# Altium PCB DACN_pcb.PcbDoc
Units mm, origin at the board's own origin, x right, y up, seen from the top; angles counter-clockwise.
Board outline 79.39 x 60.25 mm, 2 copper layers (Top Layer, Bottom Layer); 54 components, 47 nets, 221 pads, 8 vias.
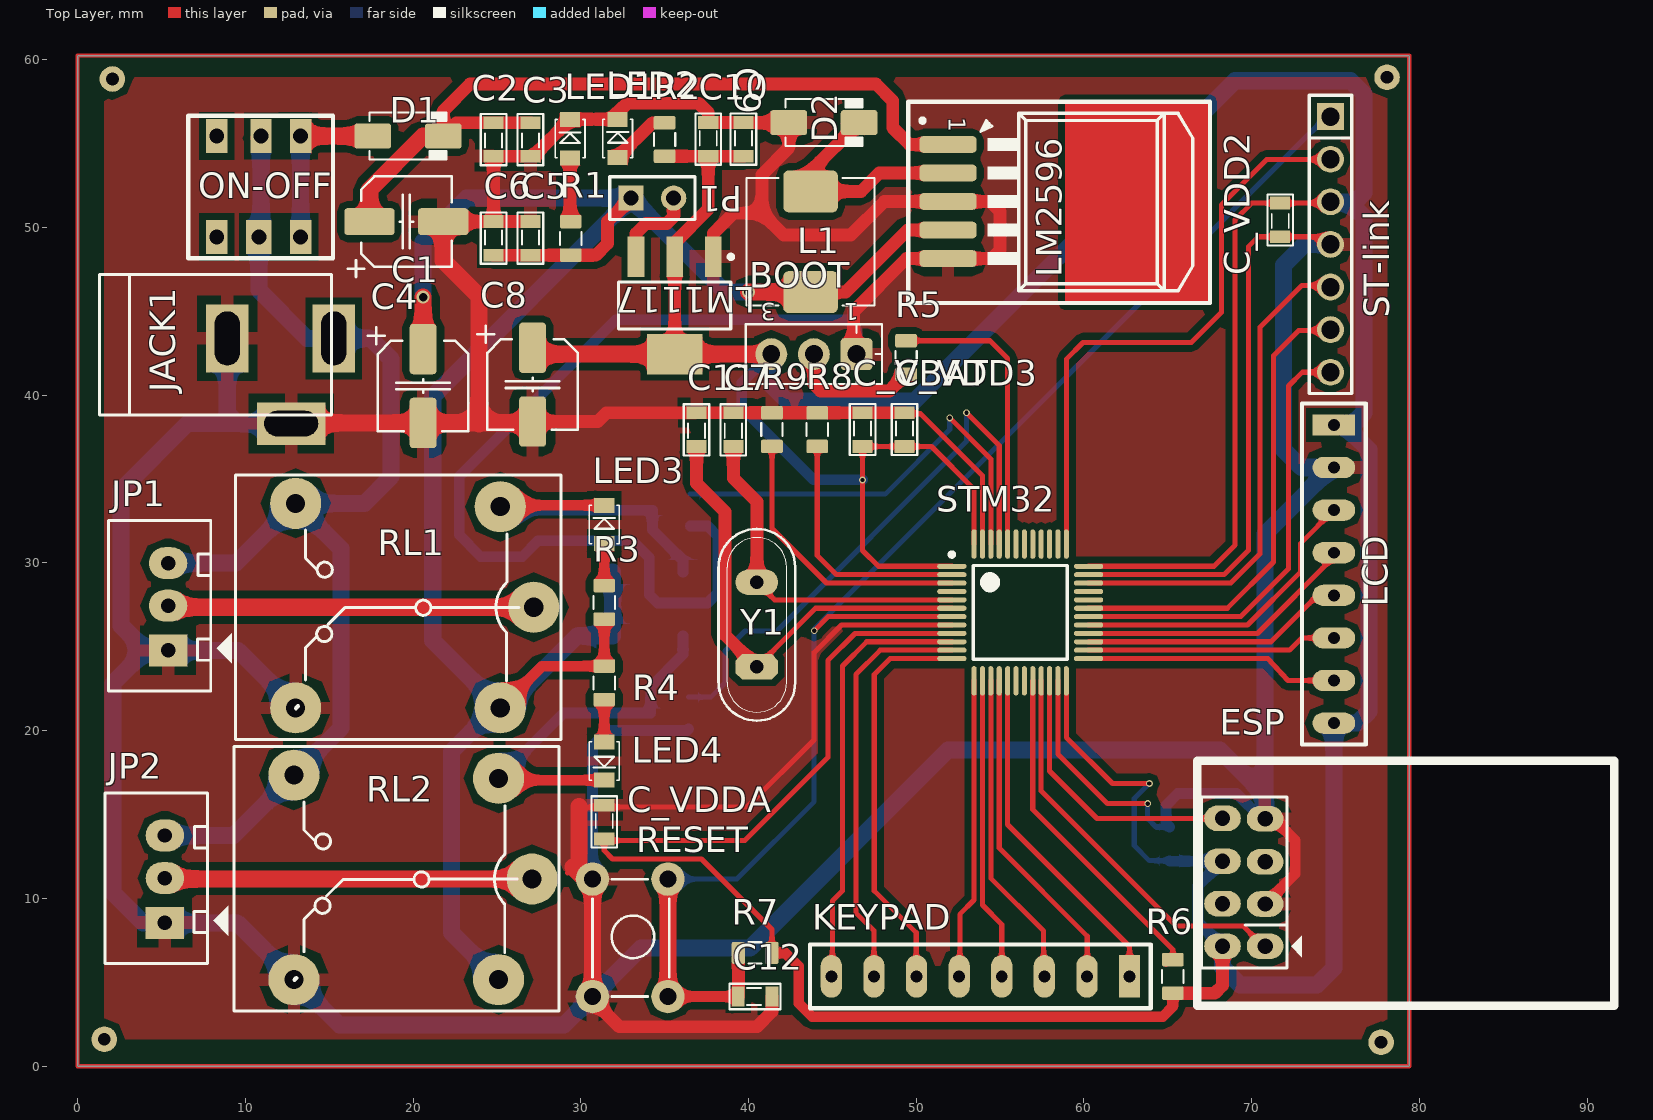
[diagram p0: Top Layer view]
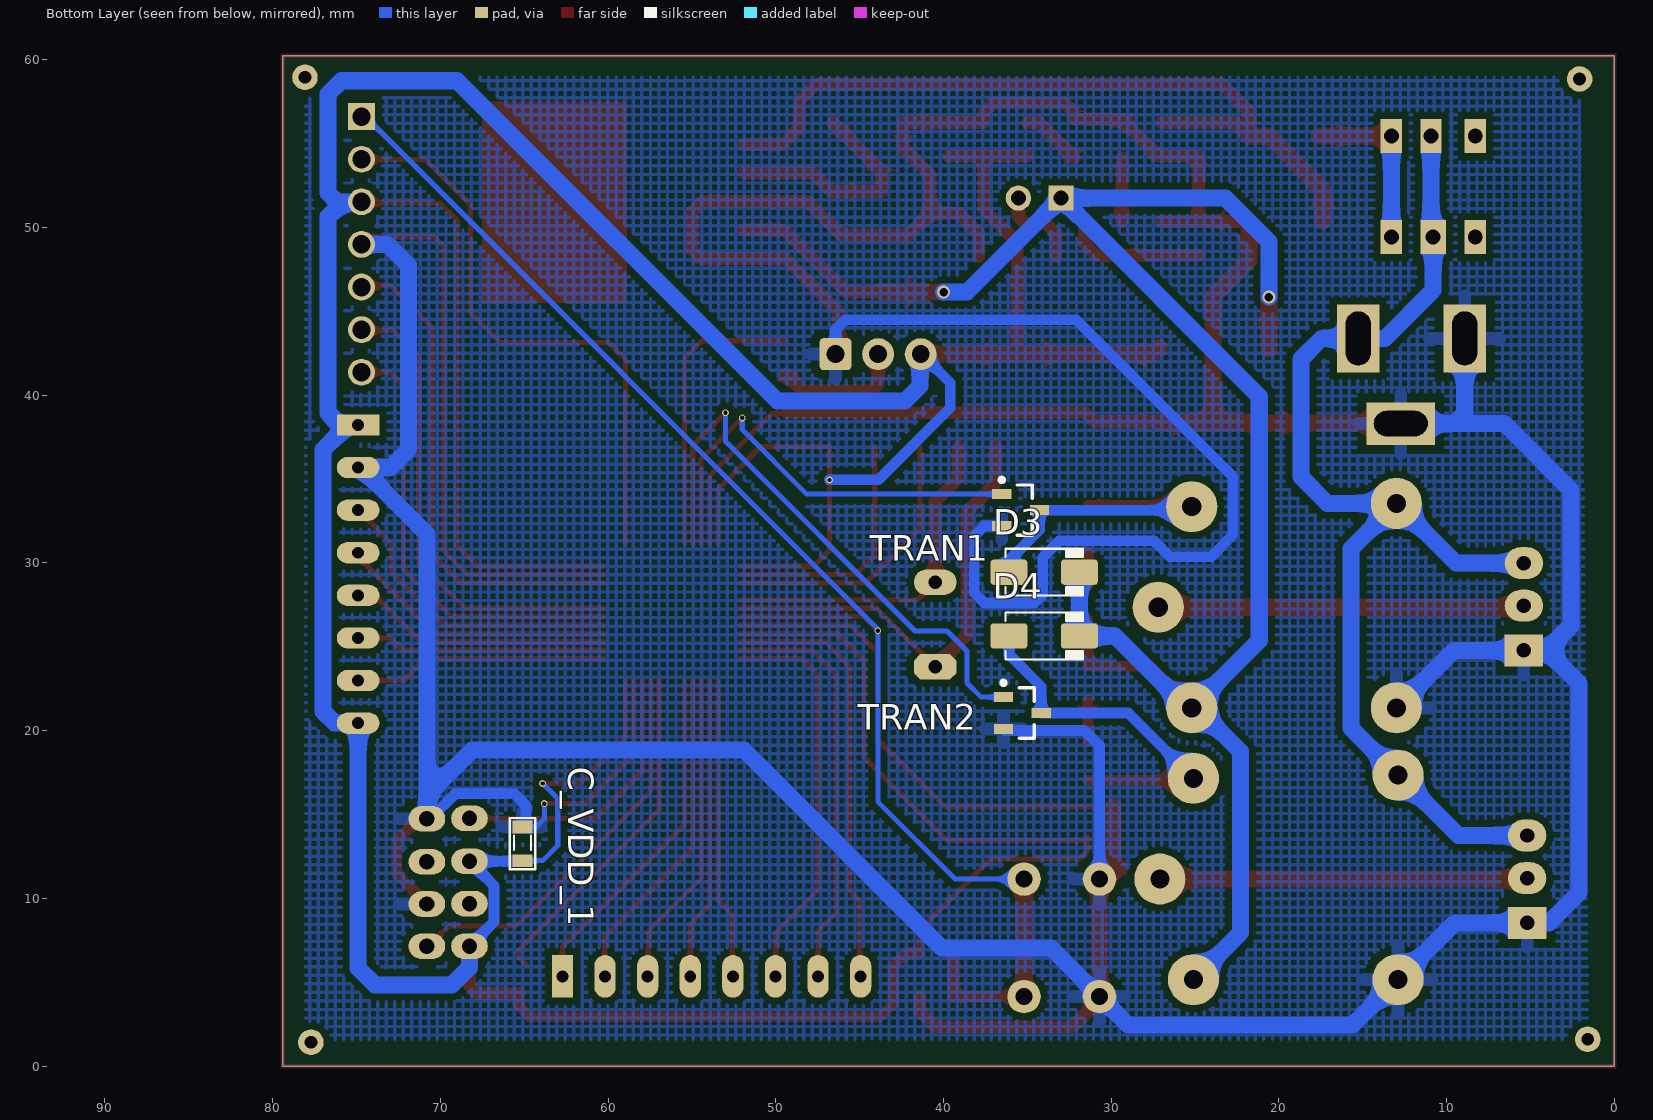
[diagram p1: Bottom Layer view, seen from below]
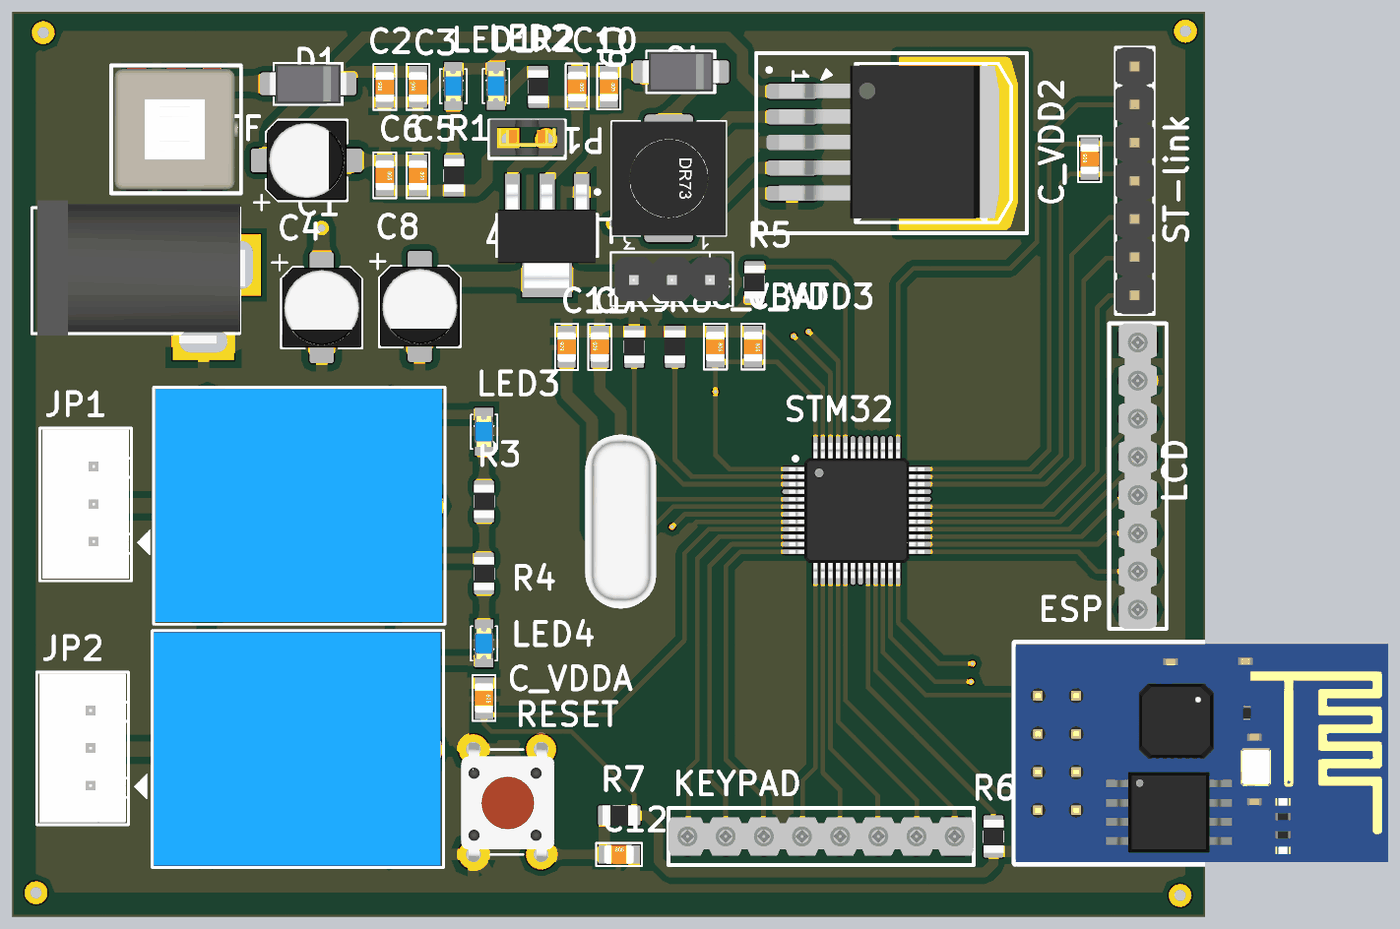
[diagram p2: 3D render of the assembled board from above, using the file's embedded part models]
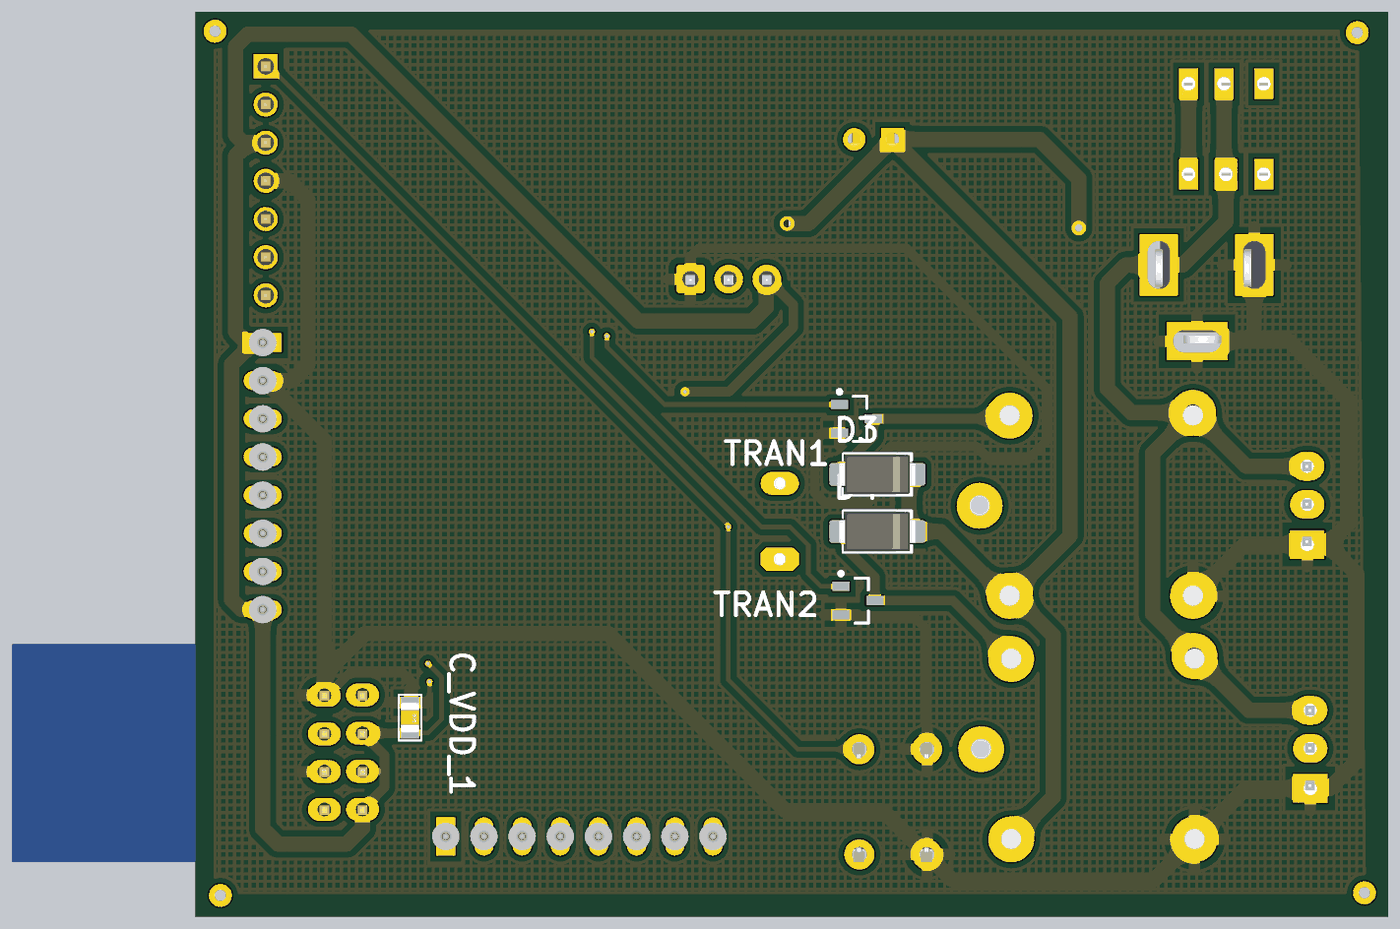
[diagram p3: 3D render of the assembled board from below, using the file's embedded part models]

## Layer stack, top to bottom
Top Solder: solder mask 0.0102, Solder Resist, Dk 3.5
Top Layer: signal copper 0.0356
Dielectric 1: dielectric 0.32, FR-4, Dk 4.8
Bottom Layer: signal copper 0.0356
Bottom Solder: solder mask 0.0102, Solder Resist, Dk 3.5

## Board outline
0,0 79.392,0 79.392,33.958 79.392,60.25 0,60.25

## Design rules (kind name [scope] priority, off if disabled: settings)
Clearance [All] p1: gap=0.4 ignorepadtopadclearanceinfootprint=FALSE
PlaneConnect [All] p1: planeconnectstyle=Relief reliefexpansion=0.508 reliefentries=4 reliefconductorwidth=1 reliefairgap=0.4
PolygonConnect [All] p1: connectstyle=Relief reliefconductorwidth=0.762 reliefentries=4 polygonreliefangle="90 Angle" airgapwidth=0.508
RoutingVias [All] p1: holewidth=1.2 width=1.5 viastyle="Through Hole" minholewidth=1.2 minwidth=1.5 maxholewidth=1.2 maxwidth=1.5
SolderMaskExpansion [All] p1: expansion=0.102
Width [All] p1: maxlimit=1.016 minlimit=0.305 preferedwidth=0.635
29 further rules are at their usual default settings.

## Components (designator, comment, footprint, x,y, rotation, side; value= is the part's Value field where it differs from the comment)
BOOT "CONN_HEADER_1x3P_0.100in" 1x3POS_HEADER 43.9,42.45 r270 top value="Single-row, 3 positions"
C1 "10µF" CAP_ELEC_5x5.7 19.6,50.35 r180 top
C2 "105" SM-CAP-0805 24.8,54.091 r90 top value=0,1uF/300V
C3 "104" SM-CAP-0805 27,54.091 r90 top value=0,1uF/300V
C4 "10µF" CAP_ELEC_5x5.7 20.6,40.55 r90 top
C5 "105" SM-CAP-0805 27,50.503 r270 top value=0,1uF/300V
C6 "104" SM-CAP-0805 24.8,50.503 r270 top value=0,1uF/300V
C7 "20pF" SM-CAP-0805 39.1,36.791 r90 top value=0,1uF/300V
C8 "10µF" CAP_ELEC_5x5.7 27.127,40.63 r90 top
C9 "105" SM-CAP-0805 39.7,56.409 r270 top value=0,1uF/300V
C10 "104" SM-CAP-0805 37.6,56.409 r270 top value=0,1uF/300V
C11 "20pF" SM-CAP-0805 36.9,36.791 r90 top value=0,1uF/300V
C12 "100nF" SM-CAP-0805 39.241,4.15 r0 top value=0,1uF/300V
C_VBAT "104" SM-CAP-0805 46.8,39.103 r270 top value=0,1uF/300V
C_VDD2 "104" SM-CAP-0805 71.7,49.298 r90 top value=0,1uF/300V
C_VDD3 "104" SM-CAP-0805 49.3,39.103 r270 top value=0,1uF/300V
C_VDD_1 "104" SM-CAP-0805 65.1,14.409 r270 bottom value=0,1uF/300V
C_VDDA "104" SM-CAP-0805 31.4,15.709 r270 top value=0,1uF/300V
D1 "Diode  1N4007" DO-214AC 19.7,55.45 r0 top value=1N4007
D2 "Diode  1N4007" DO-214AC 44.5,56.25 r0 top value=1N4007
D3 "Diode  1N4007" DO-214AC 34,29.45 r180 bottom value=1N4007
D4 "Diode  1N4007" DO-214AC 34,25.65 r180 bottom value=1N4007
ESP "ESP8266" ESP2866 70.8,7.15 r90 top
JACK1 "JACK DC" "JACK DC" 12.1,40.85 r0 top value="Jac DC"
JP1 "JP3" CON3 5.4,24.91 r90 top value="Connector 3"
JP2 "JP3" CON3 5.2,8.67 r90 top value="Connector 3"
KEYPAD "JP8" jam8 62.72,5.35 r180 top value="Connector 8"
L1 "33µH" IND_WW_DR73 43.7,49.15 r270 top
LCD "JP8" jam8 74.9,38.23 r270 top value="Connector 8"
LED1 "LED SMD" SM-LED-0805-Blue 29.36,54.15 r90 top
LED2 "LED SMD" SM-LED-0805-Blue 32.2,54.164 r90 top
LED3 "LED SMD" SM-LED-0805-Blue 31.4,31.15 r90 top
LED4 "LED SMD" SM-LED-0805-Blue 31.4,19.336 r270 top
LM1117 "LM1117-adj" SOT223-4N 35.6,45.35 r270 top value=LM317
LM2596 "LM2976" TO263 57.869,51.931 r270 top
ON-OFF "SW 6 PIN" SW6 8.271,50.015 r90 top
P1 "HEADER" "JUMPER PITCH 2 PIN" 33,51.75 r0 top
R1 "Jumper" RESC2012N_ZERO 29.4,49.35 r90 top value=1K
R2 "Jumper" RESC2012N_ZERO 35,55.25 r90 top value=1K
R3 "Jumper" RESC2012N_ZERO 31.4,27.65 r90 top value=1K
R4 "Jumper" RESC2012N_ZERO 31.4,22.85 r270 top value=1K
R5 "Jumper" RESC2012N_ZERO 49.4,42.25 r90 top value=1K
R6 "Jumper" RESC2012N_ZERO 65.3,5.35 r90 top value=1K
R7 "Jumper" RESC2012N_ZERO 40.4,6.75 r0 top value=100K
R8 "Jumper" RESC2012N_ZERO 44.1,37.95 r90 top value=10K
R9 "Jumper" RESC2012N_ZERO 41.4,37.95 r90 top value=10K
RESET "SWITCH" "SW 4PIN" 30.7,4.15 r90 top
RL1 "Relay" RL_SPDT_10A 27.2,27.358 r180 top value="Relay SPDT, 10A, 12V"
RL2 "Relay" RL_SPDT_10A 27.1,11.158 r180 top value="Relay SPDT, 10A, 12V"
ST-link "JP7" JP7-D1T 74.7,56.61 r270 top
STM32 "STM32F103C8T6-LQFP48" "LQFP 48 PIN" 56.2,27.05 r0 top
TRAN1 "C1815" C1815 35.4,33.15 r180 bottom
TRAN2 "C1815" C1815 35.3,21.05 r180 bottom
Y1 "8 MHz" "CRYSTAL DIP" 40.5,26.31 r90 top

## Footprints (in the part's own frame and the unit in brackets; to place one, negate y for a bottom-side part, rotate by r counter-clockwise, add the part's x,y. Pads: shape width x height; smd on the part's side, far side on the other; paste and mask are expansions set on the pad)
1x3POS_HEADER [mil] "Connector Header, Single-row 3-position, 0.100\" pitch"
  rrect25% 75x75 hole 42: 1(0,100)
  round 75 hole 42: 2(0,0) 3(0,-100)
  silkscreen extent -70,-160 70,160, body extent -57,-150 57,150, height 335
C1815 [mm] "SOT23, 3-Leads, Body 2.9x1.3mm, Pitch 0.95mm, Lead Span 2.4mm, IPC Medium Density"
  rect 1.15x0.6 smd: 1(-1.125,0.95) 2(-1.125,-0.95) 3(1.125,0)
  silkscreen extent -1.25,-1.5 0.7,1.92, body extent -0.7,-1.5 0.7,1.5, height 1.14
CAP_ELEC_5x5.7 [mm] "Capacitor, polarized, aluminum can; 5x5.7mm DxH"
  round 0.508 on Mech15: 0(0,0)
  rrect25% 3x1.6 smd: 1(2.2,0) 2(-2.2,0)
  silkscreen extent -2.7,-2.7 3.5,3.3, body extent -2.65,-2.65 2.65,2.65, height 5.7
CON3 [mil] "CON 3 - Header White"
  rect 75x90 hole 34: 1(-5,0)
  oval 75x90 hole 34: 2(100,0) 3(200,0)
  silkscreen extent -100,-150 300,140, body extent -94,-94 296,133, height 276
"CRYSTAL DIP" [mm]
  oct 1.524x2.54 hole 0.8: 1(-2.5,0)
  oval 1.524x2.54 hole 0.8: 2(2.54,0)
  silkscreen extent -5.71,-2.29 5.71,2.29, body extent -5.63,-2.35 5.72,2.3, height 3.5
DO-214AC [mm] "JEDEC DO214 variation AC. SMA"
  round 0.508 on Mech15: 0(0,0)
  rrect25% 2.2x1.5 smd: A(-2.1,0) K(2.1,0)
  silkscreen extent -2.3,-1.4 2.3,1.4, body extent -2.6,-1.3 2.6,1.3, height 2.42
ESP2866 [mil]
  oval 60x86 hole 36: 1(0,0) 2(99,0) 3(198,0) 4(299,0) 5(0,100) 6(100,100) 7(199.5,100) 8(300,100)
  silkscreen extent -140,-820 435,159, body extent -137,-817 433,159, height 231
IND_WW_DR73 [mm] "Wire-wound power inductor, Cooper Bussmann DR73 series, IPC Medium Density"
  round 0.5 on Mech15: 0(0,0)
  rrect25% 2.5x3.25 smd: 1(-3,0) 2(3,0)
  silkscreen extent -3.81,-3.81 3.81,3.81, body extent -3.8,-3.8 3.8,3.8, height 3.55
"JACK DC" [mm] "Jac DC input"
  rect 2.54x4.064 hole 1.5 slot 3.2 at 90 deg: 1(3.175,2.54) 2(-3.175,2.54)
  rect 4.064x2.54 hole 1.5 slot 3.2 at 0 deg: 3(0.635,-2.54)
  silkscreen extent -10.8,-2.03 3.05,6.35, body extent -10.42,-2.67 3.4,6.84, height 11.02
jam8 [mil]
  rect 50x100 hole 28: 1(0,0)
  oval 50x100 hole 28: 2(100,0) 3(200,0) 4(300,0) 5(400,0) 6(500,0) 7(600,0) 8(700,0)
  silkscreen extent -50,-75 750,75, body extent -50,-50 750,50, height 704
JP7-D1T [mm] "7 pins, 1 row, straight, gold plating"
  rect 1.6x1.6 hole 1.1: 1(0,0)
  round 1.6 hole 1.1: 2(2.54,0) 3(5.08,0) 4(7.62,0) 5(10.16,0) 6(12.7,0) 7(15.24,0)
  silkscreen extent -1.27,-1.27 16.51,1.27, body extent -1.27,-1.27 16.51,1.27, height 8.54
"JUMPER PITCH 2 PIN" [mm] "Connector; Header; 2 Position"
  rect 1.5x1.5 hole 0.9: 1(0,0)
  round 1.5 hole 0.9: 2(2.54,0)
  silkscreen extent -1.27,-1.27 3.81,1.27, body extent -1.27,-1.27 3.81,1.33, height 7.6
"LQFP 48 PIN" [mm] "TSQFP, 48-Leads, Body 9.2x9.2mm (max), Pitch 0.50mm, IPC Medium Density"
  oval 1.75x0.3 smd: 1(-4.075,2.75) 2(-4.075,2.25) 3(-4.075,1.75) 4(-4.075,1.25) 5(-4.075,0.75) 6(-4.075,0.25) 7(-4.075,-0.25) 8(-4.075,-0.75) 9(-4.075,-1.25) 10(-4.075,-1.75) 11(-4.075,-2.25) 12(-4.075,-2.75) 25(4.075,-2.75) 26(4.075,-2.25) 27(4.075,-1.75) 28(4.075,-1.25) 29(4.075,-0.75) 30(4.075,-0.25) 31(4.075,0.25) 32(4.075,0.75) 33(4.075,1.25) 34(4.075,1.75) 35(4.075,2.25) 36(4.075,2.75)
  oval 0.3x1.75 smd: 13(-2.75,-4.075) 14(-2.25,-4.075) 15(-1.75,-4.075) 16(-1.25,-4.075) 17(-0.75,-4.075) 18(-0.25,-4.075) 19(0.25,-4.075) 20(0.75,-4.075) 21(1.25,-4.075) 22(1.75,-4.075) 23(2.25,-4.075) 24(2.75,-4.075) 37(2.75,4.075) 38(2.25,4.075) 39(1.75,4.075) 40(1.25,4.075) 41(0.75,4.075) 42(0.25,4.075) 43(-0.25,4.075) 44(-0.75,4.075) 45(-1.25,4.075) 46(-1.75,4.075) 47(-2.25,4.075) 48(-2.75,4.075)
  silkscreen extent -4.2,-2.8 2.8,3.57, body extent -4.5,-4.5 4.5,4.5, height 1.45
RESC2012N_ZERO [mm] "Chip Resistor, Body 2.0x1.2mm, 0805, IPC Medium Density"
  round 0.254 on Mech15: 0(0,0)
  rrect25% 0.8x1.3 smd: 1(-1,0) 2(1,0)
  Top Layer pour cut-out: -0.725,0.65 -0.525,0.85 0.525,0.85 0.725,0.65 0.725,-0.65 0.525,-0.85 -0.525,-0.85 -0.725,-0.65
  silkscreen extent -0.38,-0.64 0.38,0.64, body extent -1.1,-0.67 1.1,0.68, height 0.69
RL_SPDT_10A [mil] "Relay SPDT, 5 pin, 10A,W 650mil, L 800mil, H 800mil"
  round 120 hole 45: 1(0,0) 2(559.06,236.22) 3(559.06,-243.78) 4(78.74,-236.22) 5(78.74,236.22)
  silkscreen extent -63,-311 700,310, body extent -55,-306 697,304, height 602
SM-CAP-0805 [mil]
  rect 30x47.24 smd: 1(6,0) 2(85,0)
  silkscreen extent -15,-30 105,30, body extent 6,-25 84,25, height 31
SM-LED-0805-Blue [mm]
  rect 0.9x1.2 smd: 1(0,0) 2(2.286,0)
  silkscreen extent 0,-0.89 2.29,0.89, body extent 0.13,-0.62 2.15,0.63, height 1.1
SOT223-4N [mm] "SOT223, 4-Leads, Body 6.5x3.5mm, Pitch 2.3mm, Lead Span 7mm, IPC Medium Density"
  rect 2.4x1 smd: 1(-2.9,2.3) 2(-2.9,0) 3(-2.9,-2.3)
  rect 2.4x3.3 smd: 4(2.9,0)
  silkscreen extent -3.02,-3.35 1.4,3.48, body extent -3.39,-3.27 3.5,3.23, height 1.72
SW6 [mil]
  rect 80x50 hole 35: 1(-23,-1) 3(-23,-198) 4(214,-198) 5(214,-105) 6(214,-1)
  rect 80x60 hole 35: 2(-23,-100)
  silkscreen extent -73,-274 262,66, body extent -62,-265 252,57, height 524
"SW 4PIN" [mm] "SW button 4pin, 250 x250 mil"
  round 2 hole 1: 1(0,0) 1(7,0) 2(0,-4.5) 2(7,-4.5)
  silkscreen extent 0,-4.57 6.98,0, body extent -0.52,-5.39 7.38,0.81, height 7
TO263 [mm]
  rrect50% 1x3.4 smd: 1(-3.019,-5.969) 2(-1.319,-5.969) 4(2.081,-5.969) 5(3.781,-5.969)
  rrect50% 1x3.4 smd mask+0: 3(0.381,-5.969)
  Top Layer region: -5.568,1.016 6.432,1.016 6.432,9.65 -5.568,9.65
  silkscreen extent -5.57,-8.35 6.43,9.65, body extent -4.73,-6.84 5.43,7.8, height 4.57

## Part data
BOOT: "Pin Header, THT, Single-row, 2.54mm pitch", Manufacturer 1=3M, Manufacturer Part Number 1=929647-09-36-I, Package / Case="Pin header; 2.54mm pitch", Category=Connectors, Mounting Type="Through Hole", Pitch="0.100\" (2.54mm)", QtyOverride=0.1, SCDType=undef, Terminal Block Type="Header, Male Pins, Single"
C1 C4 C8: library part "CAP Aluminum"
  C1: =680µF
  C4: =220µF
  C8: =100µF
C2 C3 C5 C6 C7 C9 C10 C11 C12 C_VBAT C_VDD2 C_VDD3 C_VDD_1 C_VDDA: library part "CAP SMD", Designed by=VanDungEvn
D1 D2 D3 D4: "Diode 1A"
JP1 JP2: library part Con3, "Connector 3"
KEYPAD LCD: library part "jam 8", "jam 8"
L1: library part INDC_10u_DR73-100-R, "Inductor Power 10µH 2.1A 7.6x7.6mm SMD", Manufacturer 1="Cooper Bussmann", Manufacturer Part Number 1=DR73-100-R, Package / Case=5.0x5.0x4.5mm, Ratings="2.1 A", Supplier Part Number 1=513-1129-1-ND, Tolerance=±20%, ComponentLink1Description=http://www.cooperindustries.com/content/dam/public/bussmann/Electronics/Resources/Data%20Sheets/Bus_Elx_DS_4315_DR_Series.pdf, ComponentLink1URL=http://www.cooperindustries.com/content/dam/public/bussmann/Electronics/Resources/Data%20Sheets/Bus_Elx_DS_4315_DR_Series.pdf, Material="ferrite shielded", SCDType=spec, Supplier 1=Digi-Key
LED1 LED2 LED3 LED4: library part "LED SMD 0805"
LM1117: "3v3"
LM2596: library part LM2596, Max Input Voltage="12 V", Max Output Current="3 (6.0 peak) A", Max Output Voltage=mV, Temperature Range="-40 to +125 degC", Category=IC-Power, Min Input Voltage=mV, Min Output Voltage=mV, Mounting Technology="Surface Mount", Status=Unreleased, Supply Voltage=mV
P1: library part "HEADER CONNECT"
R1 R2 R3 R4 R5 R6 R7 R8 R9: library part RES_0805, "Resistor SMD chip 0.0 Ohm 0.125W 0805", Manufacturer 1="Samsung Electro-Mechanics America, Inc", Manufacturer 2="Stackpole Electronics Inc", Manufacturer 3=Yageo, Manufacturer 4="Panasonic Electronic Components", Manufacturer 5="Rohm Semiconductor", Manufacturer Part Number 1=RC2012J000CS, Manufacturer Part Number 2=RMCF0805ZT0R00, Manufacturer Part Number 3=RC0805JR-070RL, Manufacturer Part Number 4=ERJ-6GEY0R00V, Manufacturer Part Number 5=MCR10ERTJ000, Package / Case="0805 (2012 metric)", Ratings=1/8W, Supplier Part Number 1=1276-5466-6-ND, Tolerance=N/A, ComponentLink1Description=http://www.samsungsem.com/servlet/FileDownload?filename=productcatalog/pdf/Chip_Resistor.pdf, ComponentLink1URL=http://www.samsungsem.com/servlet/FileDownload?filename=productcatalog/pdf/Chip_Resistor.pdf, ComponentLink2Description=http://www.seielect.com/Catalog/SEI-RMCF_RMCP.pdf, ComponentLink2URL=http://www.seielect.com/Catalog/SEI-RMCF_RMCP.pdf, ComponentLink3Description=http://media.digikey.com/pdf/Data%20Sheets/Yageo%20PDFs/RC0805%20Pb%20Free.pdf, ComponentLink3URL=http://media.digikey.com/pdf/Data%20Sheets/Yageo%20PDFs/RC0805%20Pb%20Free.pdf, ComponentLink4Description=http://industrial.panasonic.com/www-cgi/jvcr13pz.cgi?E+PZ+3+AOA0001+ERJ6GEY0R00V+7+WW, ComponentLink4URL=http://industrial.panasonic.com/www-cgi/jvcr13pz.cgi?E+PZ+3+AOA0001+ERJ6GEY0R00V+7+WW, ComponentLink5Description=http://rohmfs.rohm.com/en/products/databook/datasheet/passive/resistor/chip_resistor/mcr_g.pdf, ComponentLink5URL=http://rohmfs.rohm.com/en/products/databook/datasheet/passive/resistor/chip_resistor/mcr_g.pdf, RoHS 1="RoHS Compliant", RoHS 2="RoHS Compliant", RoHS 3="RoHS Compliant", RoHS 4="RoHS Compliant", RoHS 5="RoHS Compliant", SCDType=spec, Supplier 1=Digi-Key, Supplier 2=Digi-Key, Supplier 3=Digi-Key, Supplier 4=Digi-Key, Supplier 5=Digi-Key, Supplier Part Number 2=RMCF0805ZT0R00DKR-ND, Supplier Part Number 3=311-0.0ARDKR-ND, Supplier Part Number 4=P0.0ADKR-ND, Supplier Part Number 5=RHM0.0CPDKR-ND
RL1 RL2: library part "Relay SRD", "Relay SPDT 5 Pin", ="Relay SPDT, 10A, 24V"
ST-link: "WR-PHD 2.54 mm Angled Socket Header", Manufacturer="W¨¹rth Elektronik eiSos GmbH", partNo=613007143121, ComponentLink1 Description=Manufacturer, ComponentLink1URL=http://www.we-online.com, ComponentLink2 Description=Datasheet, ComponentLink2URL=http://katalog.we-online.de/em/datasheet/6130xx143121.pdf, Created by="Karrer Zheng", Created Date="29 March 2013", NoPins=07
TRAN1 TRAN2: "NPN 600mW, ECB", =C2383
Y1: library part Crystal, LatestRevisionDate=17-Jul-2002, LatestRevisionNote="Re-released for DXP Platform.", PackageReference=R38, Published=8-Jun-2000, Publisher="Altium Limited"
RESET: LatestRevisionDate=17-Jul-2002, LatestRevisionNote="Re-released for DXP Platform.", PackageReference=SPST-2, Published=24-Mar-1999, Publisher="Altium Limited"
STM32: ComponentLink1Description="Manufacturer Link", ComponentLink1URL=www.st.com/stm32, ComponentLink2Description=Datasheet, ComponentLink2URL=http://www.st.com/stonline/products/literature/ds/13586.pdf, DatasheetVersion="rev6, Mar-2008", PackageDescription="48-Pin Low-Profile Quad Flat Pack, 7 x 7 mm Body, 0.5 mm Pitch (LQFP48)", PackageReference=LQFP48, PackageVersion=Mar-2008, Published=30-May-2008, Publisher="Altium Limited"

## Free pads (board coordinates)
  round 1.524 hole 0.762: 2(78.071,58.953) 5(77.716,1.422) 6(1.592,1.6) 7(2.075,58.852)

## Via types
v1: diameter 0.406, hole 0.254, Top Layer to Bottom Layer, 6 vias
v2: diameter 0.762, hole 0.508, Top Layer to Bottom Layer, 2 vias

## Nets (pads, with @x,y where several pads share a name; then routed paths per layer and width w, separated by ;. In a path a pad name is that pad's centre, name@x,y a point inside that pad or via, vN(x,y) a via of type N, cw(c..) or ccw(c..) an arc to the next point about the centre after c; other vN are vias at no path point)
+3.3V: BOOT.3 C8.1 C9.2 C10.2 C_VBAT.2 C_VDD2.2 C_VDD3.2 C_VDD_1.2 C_VDDA.2 ESP.5 ESP.7 LCD.1 LCD.8 LM1117.2 LM1117.4 R2.1 R6.1 R7.2 ST-link.3 STM32.1 STM32.9 STM32.24 STM32.36 STM32.48 | length 316.4
  Top Layer w0.305: C_VDDA.2 31.4,12.85 31.9,12.35 37.2,12.35 41.4,8.15 R7.2 ; C_VDDA.2@31.4,13.65 31.6,13.45 39.775,13.45 44.733,18.408 44.733,24.183 46.35,25.8 STM32.9 ; STM32.1 47.75,29.8 46.8,30.75 v1(46.8,34.95) C_VBAT.2 C_VDD3.2 50.907,36.944 53.45,34.4 STM32.48 ; STM32.24 58.95,19.6 61.7,16.85 v1(63.9,16.85) ; STM32.36 67.75,29.8 69.01,31.06 69.01,50.46 70,51.45 C_VDD2.2@71.7,51.45 ; C_VDD2.2 74.627,51.457 ST-link.3
  Top Layer w0.635: R7.2 42.2,6.75 43,5.95 43,3.75 43.8,2.95 64.7,2.95 65.3,3.55 R6.1
  Top Layer w0.762: R2.1 C10.2 ; LM1117.4 LM1117.2 ; LM1117.2@35.6,48.05 35.6,49.096 37.6,51.096 C10.2 ; C9.2 C10.2 ; R6.1 67.8,4.35 68.26,4.81 ESP.5
  Top Layer w1.016: C8.1 27.507,42.45 LM1117.4 BOOT.3@41.16,42.45
  Top Layer w1.143: BOOT.3@41.16,42.45 BOOT.3@41.36,42.65
  Bottom Layer w0.305: v1(63.9,16.85) 63,15.95 63,13.15 63.9,12.25 C_VDD_1.2
  Bottom Layer w0.635: BOOT.3@41.1,42.25 39.6,40.75 39.6,39.25 43.9,34.95 v1(46.8,34.95) ; C_VDD_1.2 65.133,12.217 ESP.7 66.8,10.757 66.8,8.61 ESP.5
  Bottom Layer w1.016: BOOT.3@41.4,42.05 41.4,40.55 42.3,39.65 49.9,39.65 69,58.75 75.9,58.75 76.7,57.95 76.7,52.05 76.18,51.53 75.82,51.53 ; ESP.5 68.26,5.89 69.3,4.85 73.9,4.85 74.9,5.85 LCD.8 76.3,20.45 76.983,21.133 76.983,36.767 LCD.1@75.52,38.23 ; ST-link.3 75.82,51.53 ; LCD.1 LCD.1@75.52,38.23 ; LCD.1@75.52,38.23 75.98,38.23 76.7,38.95 76.7,50.65 75.82,51.53
+5V: C4.1 C5.2 C6.2 D3.K D4.K L1.2 LM2596.4 P1.1 R1.1 R3.1 R4.1 RL1.5 RL2.5 | length 131
  Top Layer w0.635: RL1.5 27.692,23.85 R4.1 R3.1
  Top Layer w0.762: C6.2 C5.2 29.393,48.344 R1.1 30.9,48.35 31.6,49.05 31.6,50.35 P1.1 ; L1.2 45.8,46.15 49.5,49.85 LM2596.4
  Top Layer w1.016: C4.1 v2(20.6,45.85) ; v2(40,46.15) L1.2
  Bottom Layer w1.016: v2(20.6,45.85) 20.6,49.15 23.2,51.75 P1.1 ; RL2.5 22.3,7.958 22.3,18.75 24.908,21.358 RL1.5 ; D3.K D4.K 29.782,25.65 25.49,21.358 RL1.5 ; v2(40,46.15) 38.6,46.15 P1.1 ; RL1.5 21.175,25.383 21.175,39.926 P1.1
+12V: JACK1.1 JP1.3 JP2.3 ON-OFF.2 ON-OFF.5 RL1.3 RL2.3 | length 69.5
  Top Layer w1.016: ON-OFF.5@10.811,55.323 ON-OFF.5 ON-OFF.5@10.938,55.87
  Bottom Layer w1.016: JP2.3 9.3,13.75 RL2.3 15.7,20.15 15.7,30.85 RL1.3 ; JP1.3 9.44,29.99 RL1.3 ; ON-OFF.5 10.938,49.557 ON-OFF.2 10.811,46.261 13.682,43.39 JACK1.1 17.46,43.39 18.7,42.15 18.7,35.15 17.1,33.55 RL1.3
Boot0: R5.2 STM32.44 | length 17.6
  Top Layer w0.305: R5.2 54.4,43.25 55.45,42.2 STM32.44
BOOT1: R6.2 STM32.20 | length 20.5
  Top Layer w0.305: STM32.20 56.95,15.3 65.3,6.95 65.3,6.475 R6.2@64.9,6.075
D/C: LCD.5 STM32.27 | length 15.8
  Top Layer w0.305: STM32.27 71.15,25.3 73.92,28.07 LCD.5
ESP_RX: ESP.1 STM32.21 | length 23.5
  Top Layer w0.305: STM32.21 57.45,16.4 65.5,8.35 69.5,8.35 ESP.1@70.6,7.25
ESP_TX: ESP.8 STM32.22 | length 16.9
  Top Layer w0.305: STM32.22 57.95,17.6 60.78,14.77 ESP.8
GND: BOOT.1 C1.2 C2.1 C3.1 C4.2 C5.1 C6.1 C7.2 C8.2 C9.1 C10.1 C11.2 C12.2 C_VBAT.1 C_VDD2.1 C_VDD3.1 C_VDD_1.1 C_VDDA.1 D2.A ESP.2 ESP.4 JACK1.2 JACK1.3 JP1.1 JP2.1 LCD.2 LED1.2 LED2.2 LM1117.1 LM2596.3 LM2596.5 R8.2 R9.2 RESET.1 RL1.2 RL2.2 ST-link.4 STM32.8 STM32.23 STM32.35 STM32.47 TRAN1.2 TRAN2.2 | length 491.6
  Top Layer w0.305: 29.202,11.532 29.532,11.862 ; 30.153,15.203 30.4,15.45 39.9,15.45 43.9,19.45 43.9,24.65 45.55,26.3 STM32.8 ; C_VDD3.1 49.35,38.9 50.25,38.9 53.95,35.2 STM32.47 ; STM32.23 58.45,18.6 61.4,15.65 v1(63.8,15.65) ; STM32.35 68.35,29.3 69.8,30.75 69.8,48.85 70.4,49.45 C_VDD2.1 74.24,49.45 ST-link.4
  Top Layer w0.635: ESP.2 72.6,11.465 72.6,13.45 71.305,14.745 ESP.4
  Top Layer w0.762: C1.2 C6.1 ; C5.1 C6.1 ; C8.2 31.013,38.43 31.533,38.95 C11.2 C7.2 R9.2 R8.2 C_VBAT.1 C_VDD3.1 ; RESET.1@30.7,3.95 32.3,2.35 40.5,2.35 41.4,3.25 C12.2 ; LM1117.1 37.9,49.65 39.1,50.85 40.8,50.85 ; BOOT.1 46.273,42.617 46.273,45.007 49.416,48.15 LM2596.5 54.5,48.15 55,48.65 55,50.95 54.4,51.55 LM2596.3 48.1,51.55 46.1,49.55 42.1,49.55 40.8,50.85 ; C6.1 C2.1 C3.1 27.168,54.244 LED1.2 29.374,56.45 LED2.2 32.2,56.85 32.762,57.412 37.038,57.412 37.6,56.85 C10.1 C9.1 39.707,56.25 D2.A 42.4,54.75 40.8,53.15 40.8,50.85
  Top Layer w1.016: JACK1.3 12.775,38.35 C4.2 23.927,38.35 ; C1.2 21.8,48.025 23.927,45.898 23.927,38.35 ; 23.927,38.278 23.927,38.35 ; C8.2@27.127,38.35 23.927,38.35 ; 29.532,11.862 30.244,11.15 30.7,11.15 30.7,4.15 RESET.1@30.7,3.95 ; 29.888,11.963 29.888,15.469
  Bottom Layer w0.305: v1(63.8,15.65) 63.8,14.75 64.293,14.257 C_VDD_1.1
  Bottom Layer w0.635: RESET.1@30.7,11.15 30.7,19.1 31.615,20.015 36.34,20.015 TRAN2.2 ; TRAN1.2 37.565,32.2 38.168,31.598 38.168,28.219 37.558,27.61 34.587,27.61 34.079,28.118 34.079,30.328 33.088,31.318 27.449,31.318 26.509,30.378 24.046,30.378 22.75,31.674 22.75,35.154 32.097,44.501 45.85,44.501 46.44,43.911 BOOT.1 ; C_VDD_1.1 64.889,14.468 64.889,15.539 65.6,16.25 69.1,16.25 70.605,14.745 ESP.4
  Bottom Layer w1.016: JACK1.2 8.925,38.925 9.54,38.31 ; JACK1.3 9.54,38.31 ; RL1.2 9.575,24.783 JP1.1 4.067,24.783 ; RESET.1@30.1,3.55 29,2.45 15.608,2.45 RL2.2 9.515,8.543 JP2.1 3.907,8.543 2.1,10.35 2.1,22.816 4.067,24.783 ; RESET.1@30.7,4.15 33.6,7.05 40.1,7.05 51.9,18.85 68.1,18.85 70.8,16.15 ; ESP.4 70.8,16.15 ; ST-link.4 73.14,48.99 71.9,47.75 71.9,36.75 72.96,35.69 LCD.2@74.758,35.69 ; LCD.2 LCD.2@74.758,35.69 ; 4.067,24.783 2.6,26.25 2.6,34.35 6.56,38.31 9.54,38.31 ; 70.8,16.15 70.8,31.733 LCD.2@74.758,35.69
JTCK: ST-link.2 STM32.37 | length 35.5
  Top Layer w0.305: STM32.37 58.95,42.15 59.95,43.15 66.4,43.15 68.2,44.95 68.2,51.35 70.9,54.05 ST-link.2@74.7,54.05
JTMS: ST-link.5 STM32.34 | length 29.7
  Top Layer w0.305: STM32.34 68.75,28.8 70.5,30.55 70.5,44.05 73,46.55 ST-link.5@74.7,46.55
NetBOOT_2: BOOT.2 R5.1 | length 7.9
  Top Layer w0.762: BOOT.2 43.9,40.65 44.3,40.25 48.4,40.25 R5.1
NetC1_1: C1.1 C2.2 C3.2 D1.K LM2596.1 | length 47.9
  Top Layer w0.762: C3.2 C2.2 22.6,56.25 D1.K 21.8,56.95 23.405,58.555 47.595,58.555 48.6,57.55 48.6,55.95 49.6,54.95 LM2596.1
  Top Layer w1.016: C1.1 17.4,52.25 20.6,55.45 D1.K
NetD2_K: D2.K L1.1 LM2596.2 | length 14
  Top Layer w0.762: D2.K 43.7,53.35 L1.1 46.7,52.15 47.8,53.25 LM2596.2
NetD3_A: D3.A LED3.2 RL1.4 TRAN1.3 | length 20
  Top Layer w0.635: RL1.4 25.278,33.436 LED3.2
  Bottom Layer w0.635: RL1.4@25.292,33.45 RL1.4 25.408,33.15 TRAN1.3 34.275,31.975 36.1,30.15 D3.A
NetD4_A: D4.A LED4.2 RL2.4 TRAN2.3 | length 22.4
  Top Layer w0.635: RL2.4 25.208,17.05 LED4.2
  Bottom Layer w0.635: RL2.4 28.992,21.05 TRAN2.3 34.175,22.625 36.1,24.55 D4.A
NetJP1_2: JP1.2 RL1.1 | length 21.8
  Top Layer w1.016: JP1.2 5.492,27.358 RL1.1
NetJP2_2: JP2.2 RL2.1 | length 21.9
  Top Layer w1.016: JP2.2 5.252,11.158 RL2.1
NetLED1_1: LED1.1 R1.2 | length 3.8
  Top Layer w0.762: LED1.1 29.36,50.39 R1.2
NetLED2_1: LED2.1 R2.2 | length 3.7
  Top Layer w0.762: LED2.1 34.286,56.25 R2.2
NetLED3_1: LED3.1 R3.2 | length 2.5
  Top Layer w0.635: R3.2 LED3.1
NetLED4_1: LED4.1 R4.2 | length 2.5
  Top Layer w0.635: LED4.1 R4.2
NetLM1117_3: LM1117.3 P1.2 | length 5.2
  Top Layer w0.762: LM1117.3 33.3,49.65 33.888,50.238 35.126,50.238 35.54,50.652 P1.2
NetR8_1: R8.1 STM32.2 | length 15
  Top Layer w0.305: R8.1 44.1,30.45 45.25,29.3 STM32.2
NetR9_1: R9.1 STM32.3 | length 17
  Top Layer w0.305: R9.1 41.4,32.05 44.65,28.8 STM32.3
NRST: C12.1 R7.1 RESET.2 ST-link.1 STM32.7 | length 86.7
  Top Layer w0.305: v1(43.917,25.959) 44.758,26.8 STM32.7
  Top Layer w0.635: RESET.2@35.2,4.15 C12.1
  Top Layer w0.762: C12.1 39.4,4.157 R7.1
  Top Layer w1.016: RESET.2@35.2,4.15 RESET.2@35.2,11.15
  Bottom Layer w0.305: RESET.2@35.2,11.15 39.3,11.15 43.917,15.767 v1(43.917,25.959) 43.917,26.067 74.46,56.61 ST-link.1
OSC_IN: C7.1 STM32.5 Y1.2 | length 20.7
  Top Layer w0.305: Y1.2 41.55,27.8 STM32.5
  Top Layer w0.762: C7.1 39.1,35.05 40.5,33.65 Y1.2
OSC_OUT: C11.1 STM32.6 Y1.1 | length 27.7
  Top Layer w0.305: Y1.1 43.99,27.3 STM32.6
  Top Layer w0.762: C11.1 36.9,34.75 38.6,33.05 38.6,25.71 Y1.1
PA0: KEYPAD.8 STM32.10 | length 25.9
  Top Layer w0.305: KEYPAD.8@45,5.35 45,9.85 45.6,10.45 45.6,23.85 47.05,25.3 STM32.10
PA1: KEYPAD.7 STM32.11 | length 24.8
  Top Layer w0.305: KEYPAD.7 47.48,8.07 46.4,9.15 46.4,23.35 47.85,24.8 STM32.11
PA2: KEYPAD.6 STM32.12 | length 24.1
  Top Layer w0.305: KEYPAD.6@50,5.35 50,7.95 47.5,10.45 47.5,23.35 48.45,24.3 STM32.12
PA3: KEYPAD.5 STM32.13 | length 18
  Top Layer w0.305: KEYPAD.5@52.6,5.35 52.6,9.05 53.45,9.9 STM32.13
PA4: KEYPAD.4 STM32.14 | length 18.1
  Top Layer w0.305: STM32.14 53.95,9.6 55.1,8.45 KEYPAD.4
PA5: KEYPAD.3 STM32.15 | length 18.9
  Top Layer w0.305: STM32.15 54.45,11.2 57.6,8.05 KEYPAD.3@57.6,5.35
PA6: KEYPAD.2 STM32.16 | length 19.8
  Top Layer w0.305: STM32.16 54.95,13 60.2,7.75 KEYPAD.2@60.2,5.35
PA7: KEYPAD.1 STM32.17 | length 20.6
  Top Layer w0.305: STM32.17 55.45,14.4 62.72,7.13 KEYPAD.1
PA11: STM32.32
PA12: STM32.33
ReLay1: STM32.46 TRAN1.1 | length 26.3
  Top Layer w0.305: v1(52,38.65) 54.45,36.2 STM32.46
  Bottom Layer w0.305: TRAN1.1 48.15,34.1 52,37.95 v1(52,38.65)
Relay2: STM32.45 TRAN2.1 | length 34.3
  Top Layer w0.305: v1(53,38.95) 54.95,37 STM32.45
  Bottom Layer w0.305: TRAN2.1 37.75,22 38.6,22.85 38.6,24.75 39.8,25.95 41.7,25.95 53,37.25 v1(53,38.95)
RST: LCD.4 STM32.28 | length 16.8
  Top Layer w0.305: STM32.28 70.35,25.8 74.9,30.35 LCD.4
SCD: LCD.3 STM32.29 | length 18.5
  Top Layer w0.305: STM32.29 69.75,26.3 72.9,29.45 72.9,31.15 LCD.3
SCLK: LCD.7 STM32.25 | length 15.2
  Top Layer w0.305: STM32.25 70.96,24.3 72.16,22.99 LCD.7
SDIN: LCD.6 STM32.26 | length 14.9
  Top Layer w0.305: STM32.26 72.25,24.8 72.98,25.53 LCD.6
UART1_RX: ST-link.6 STM32.31 | length 28.4
  Top Layer w0.305: STM32.31 68.55,27.3 71.3,30.05 71.3,42.35 72.8,43.85 ST-link.6@74.6,43.85
UART1_TX: ST-link.7 STM32.30 | length 26.8
  Top Layer w0.305: STM32.30 69.35,26.8 72.2,29.65 72.2,40.55 73.02,41.37 ST-link.7
"V ON": D1.A ON-OFF.3 ON-OFF.4 | length 10.8
  Top Layer w1.016: ON-OFF.3@13.3,49.061 ON-OFF.3 ; ON-OFF.4@13.3,55.08 13.67,55.45 D1.A
  Bottom Layer w1.016: ON-OFF.3 ON-OFF.4
pads on no net: C1.0 C4.0 C8.0 D1.0 D2.0 D3.0 D4.0 ESP.3 ESP.6 L1.0 ON-OFF.1 ON-OFF.6 R1.0 R2.0 R3.0 R4.0 R5.0 R6.0 R7.0 R8.0 R9.0 STM32.4 STM32.18 STM32.19 STM32.38 STM32.39 STM32.40 STM32.41 STM32.42 STM32.43
copper on no net: | length 279.3
  Top Layer w0.254: 0,0 79.392,0 79.392,33.958 79.392,60.25 0,60.25 0,0

## Polygon pours and split planes (outlines as drawn)
GND on Bottom Layer "Bottom Layer-No Net" (hatched 90Degree grid 0.508 track 0.203, pour order 0): 2.075,58.852 2.176,58.953 78.071,58.953 78.071,1.778 77.716,1.422 77.538,1.6 1.592,1.6
GND on Top Layer "Top Layer-No Net" (solid, pour order 2): 1.592,1.6 1.592,58.369 2.176,58.953 78.071,58.953 78.071,1.372 78.046,1.346 77.792,1.6

## Other copper
Bottom Layer:
  region net NRST: 77,57.55

## Text inside footprints (layer, text, board x,y; h text height)
BOOT: Top Overlay "1" at 46.567,45.498 h1.02 r180; Top Overlay "3" at 41.614,45.498 h1.02 r180
LM2596: Top Overlay "1" at 51.951,56.576 h1 r270